# EAGLE board timer v5 (EAGLE 9.7.0)
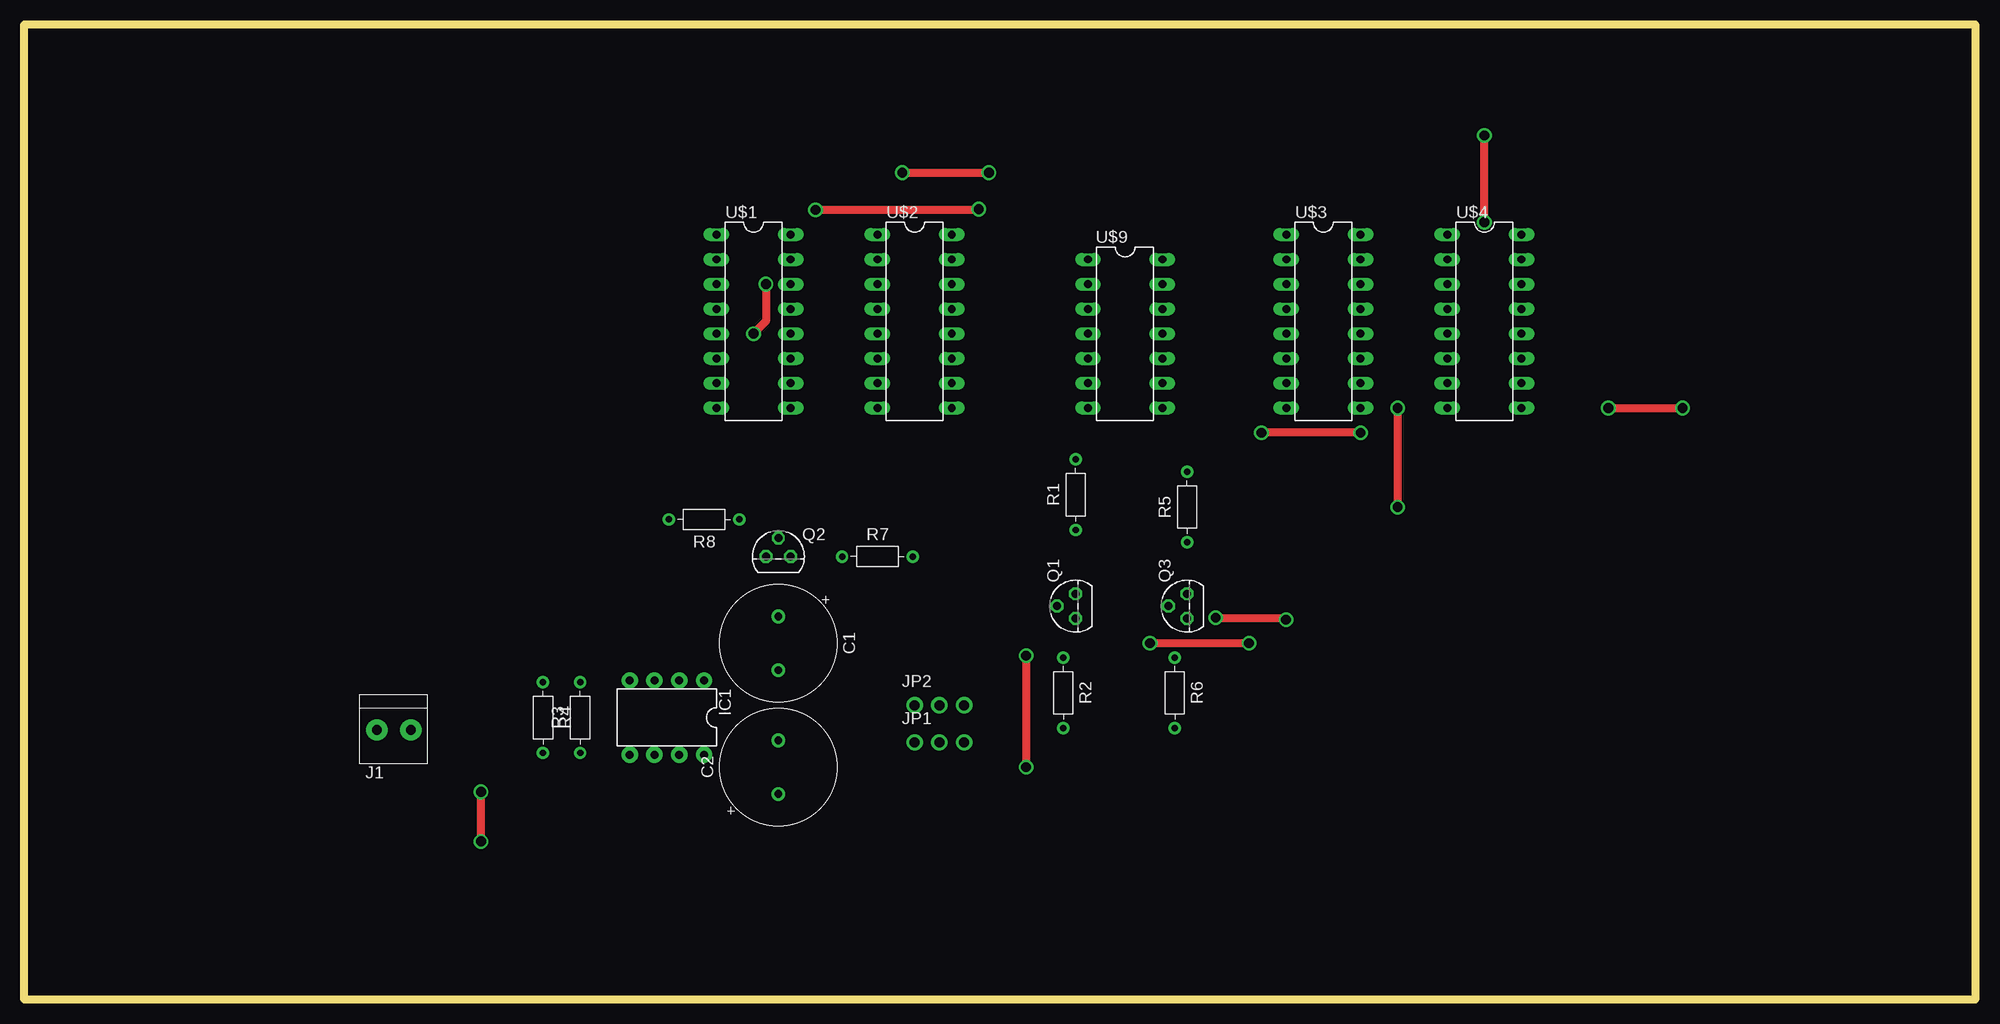
[diagram p0: board, top side]
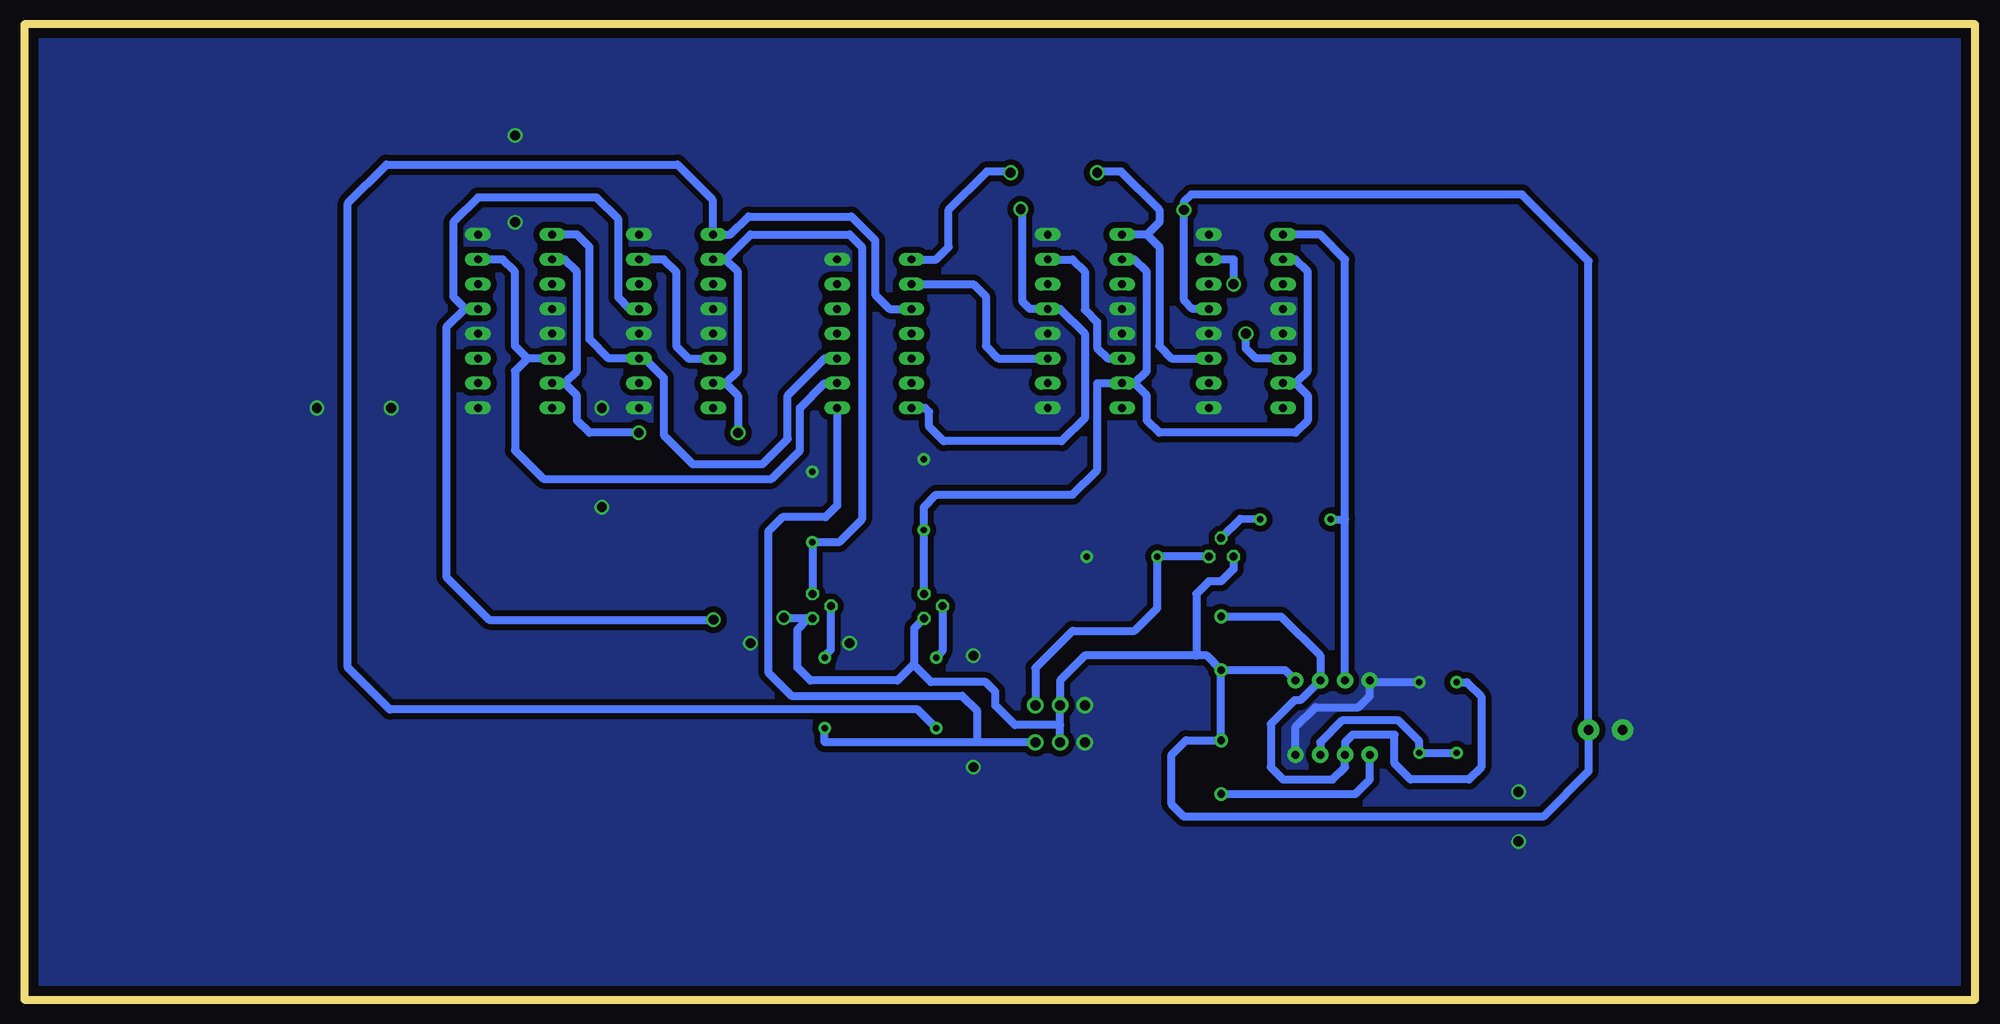
[diagram p1: board, bottom side, seen from below]

Size 200 x 100 mm. Coordinates in mm from the lower left corner, seen from the top.
Outline: 0,100 200,100 200,0 0,0 0,100
Copper layers (1*16): Top 0.035mm / dielectric 1.5mm / Bottom 0.035mm
Design rules "default": minimum track width 6mil, minimum drill 0.35mm, track to track 6mil, track to pad 6mil, pad to pad 6mil, via to via 6mil, smd to smd 6mil, copper to edge 40mil, drill to drill 6mil, minimum pad ring 10mil, minimum via ring 8mil, stop-mask expansion 4mil, vias tented up to drill 0mil, thermal gap 10mil

## Footprints (pad centres in the part's own frame; a part is rotated, then mirrored left to right if it is on the bottom)
CAPPRD550W60D1200H2000B = drill 0.8 pad 1.4: 1 -2.75,0; 2 2.75,0
DIL08-ROUND = drill 0.813 pad 1.676: 1 -3.81,-3.81; 2 -1.27,-3.81; 3 1.27,-3.81; 4 3.81,-3.81; 5 3.81,3.81; 6 1.27,3.81; 7 -1.27,3.81; 8 -3.81,3.81
1X2-3.5MM = drill 1 pad 2.184: 1 1.8,0; 2 -1.7,0
1X03-CLEANBIG = drill 1.016 pad 1.676: 1 -2.54,0; 2 0,0; 3 2.54,0
TO92 = drill 0.813 octagon: 1 -1.27,0; 2 0,1.905; 3 1.27,0
RESAD724W46L381D178B = drill 0.66 pad 1.26: 1 -3.62,0; 2 3.62,0
DIO16 = drill 0.813 long: 1 -15.24,-3.81; 2 -12.7,-3.81; 3 -10.16,-3.81; 4 -7.62,-3.81; 5 -5.08,-3.81; 6 -2.54,-3.81; 7 0,-3.81; 8 2.54,-3.81; 9 2.54,3.81; 10 0,3.81; 11 -2.54,3.81; 12 -5.08,3.81; 13 -7.62,3.81; 14 -10.16,3.81; 15 -12.7,3.81; 16 -15.24,3.81
DIO14 = drill 0.813 long: 1 -12.7,-3.81; 2 -10.16,-3.81; 3 -7.62,-3.81; 4 -5.08,-3.81; 5 -2.54,-3.81; 6 0,-3.81; 7 2.54,-3.81; 8 2.54,3.81; 9 0,3.81; 10 -2.54,3.81; 11 -5.08,3.81; 12 -7.62,3.81; 13 -10.16,3.81; 14 -12.7,3.81

## Placement (x,y rotation side)
C1  [CAPPRD550W60D1200H2000B]  77.3,36.53 270 top
C2  [CAPPRD550W60D1200H2000B]  77.3,23.83 90 top
IC1  LM555N  [DIL08-ROUND]  65.87,28.91 180 top
J1  1X2-3.5MM  [1X2-3.5MM]  37.93,27.64 180 top
JP1  [1X03-CLEANBIG]  93.81,26.37 0 top
JP2  [1X03-CLEANBIG]  93.81,30.18 0 top
Q1  NPN  [TO92]  107.78,40.34 90 top
Q2  NPN  [TO92]  77.3,45.42 0 top
Q3  NPN  [TO92]  119.21,40.34 90 top
R1  [RESAD724W46L381D178B]  107.78,51.77 90 top
R2  [RESAD724W46L381D178B]  106.51,31.45 270 top
R3  [RESAD724W46L381D178B]  56.98,28.91 90 top
R4  [RESAD724W46L381D178B]  53.17,28.91 270 top
R5  [RESAD724W46L381D178B]  119.21,50.5 90 top
R6  [RESAD724W46L381D178B]  117.94,31.45 270 top
R7  [RESAD724W46L381D178B]  87.46,45.42 0 top
R8  [RESAD724W46L381D178B]  69.68,49.23 180 top
U$1  74LS76  [DIO16]  74.76,63.2 270 top
U$2  74LS76  [DIO16]  91.27,63.2 270 top
U$3  74LS76  [DIO16]  133.18,63.2 270 top
U$4  74LS76  [DIO16]  149.69,63.2 270 top
U$9  74LS08  [DIO14]  112.86,63.2 270 top

## Library data of the parts
C1 C2 = Capacitor; CATEGORY: Capacitor
IC1 J1 JP1 JP2 = adafruit
Q1-Q3 = Transistor; CATEGORY: Transistor; SUB-CATEGORY: BJT; TYPE: NPN
R1-R8 = Tutorial - Fusion 360; CATEGORY: Resistor; SUB-CATEGORY: Fixed
U$1-U$4 U$9 = Library

## Nets
A1: U$1.6 U$1.15
A2: U$3.6 U$3.15
B1: U$1.11 U$2.1 U$9.1
B2: U$3.11 U$4.1 U$9.10
C1: U$2.6 U$2.15
C2: U$4.6 U$4.15 U$9.9
D1: U$2.11 U$9.2
D2: U$4.11
GND: C1.2 C2.2 IC1.1 J1.2 JP1.2 JP2.2 Q1.1 Q2.1 Q3.1 U$1.13 U$2.13 U$3.13 U$4.13 U$9.7
IN: IC1.3 R8.2 U$1.1
N$2: IC1.7 R3.1 R4.2
N$3: C1.1 IC1.2 IC1.6 R4.1
N$5: C2.1 IC1.5
N$6: Q2.2 R8.1
N$11: Q3.2 R6.1
N$16: Q1.2 R2.1
OUT1: R2.2 U$3.1 U$9.3
OUT2: JP1.3 R6.2 U$9.8
OUT_TO_DIS: JP2.3 Q2.3 R7.1
RES1: Q1.3 R1.1 U$1.2 U$1.7 U$2.2 U$2.7
RES2: Q3.3 R5.1 U$3.2 U$3.7 U$4.2 U$4.7
VCC: IC1.4 IC1.8 J1.1 JP1.1 JP2.1 R1.2 R3.2 R5.2 R7.2 U$1.4 U$1.5 U$1.9 U$1.12 U$1.16 U$2.4 U$2.5 U$2.9 U$2.12 U$2.16 U$3.4 U$3.5 U$3.9 U$3.12 U$3.16 U$4.4 U$4.5 U$4.9 U$4.12 U$4.16 U$9.14

## Tracks (layer width: path | path; a pad name or v marks a point on that pad's centre or on a via)
A1  (via drill 1)
  Top 0.813: v76.03,73.36 76.03,69.55 v74.76,68.28
  Bottom 0.813: U$1.15 76.03,75.9 v76.03,73.36 | U$1.6 73.72,65.74 74.76,66.78 v74.76,68.28
A2
  Bottom 0.813: U$3.15 134.45,75.9 133.18,74.63 133.18,67.01 131.91,65.74 U$3.6
B1  (via drill 1)
  Top 0.813: v90,84.79 v98.89,84.79
  Bottom 0.813: 84.92,78.44 U$2.1 | 84.92,78.44 83.65,77.17 83.65,67.01 82.38,65.74 U$1.11 | U$9.1 106.51,75.9 105.24,77.17 105.24,80.98 101.32,84.9 99,84.9 v98.89,84.79 | 84.92,78.44 83.65,79.71 83.65,80.98 87.57,84.9 89.89,84.9 v90,84.79
B2
  Bottom 0.813: U$4.1 143.34,78.44 142.07,77.17 142.07,67.71 140.1,65.74 U$3.11 136.42,65.74 134.45,63.77 134.45,57.89 131.47,54.91 124.33,54.91 121.75,57.49 121.75,61.93 117.94,65.74 U$9.10
C1
  Bottom 0.813: U$2.15 92.54,75.9 91.27,74.63 91.27,70.75 90.02,69.49 90.02,66.83 88.93,65.74 U$2.6
C2
  Bottom 0.813: U$4.6 148.42,65.74 | 148.42,65.74 149.69,67.01 149.69,74.63 150.96,75.9 U$4.15 | U$9.9 117.94,63.2 120.48,60.66 120.48,56.32 123.42,53.38 146.75,53.38 149.69,56.32 149.69,64.47 148.42,65.74
D1
  Bottom 0.813: U$9.2 102.7,73.36 101.43,72.09 101.43,67.01 100.16,65.74 U$2.11
GND  (via drill 1)
  Top 0.813: v81.11,80.98 97.77,80.98 v97.84,81.05 | v122.15,39.15 129.15,39.15 v129.35,38.95
  Bottom 0.813: U$3.13 137.93,70.82 139.1,71.99 139.1,80.01 141.34,82.25 153.5,82.25 156.04,79.71 156.04,72.09 154.77,70.82 U$4.13 154.88,70.82 156.75,68.95 156.75,43.35 152.35,38.95 v129.35,38.95 | C1.2 C2.2 80.9,26.58 82.38,25.1 82.38,20.02 81.11,18.75 44.28,18.75 39.63,23.4 J1.2 39.63,75.73 46.45,82.55 80.35,82.55 81.15,81.75 81.15,81.02 v81.11,80.98 81.11,71.71 80.22,70.82 U$1.13 | C1.2 70.74,33.78 IC1.1 | C1.2 78.78,35.26 79.84,35.26 | 79.84,35.26 91.27,35.26 93.81,32.72 JP2.2 93.81,28.15 | Q2.1 76.03,44.15 77.3,42.88 78.57,42.88 79.84,41.61 79.84,35.26 | JP1.2 93.81,28.15 | U$9.7 107.66,60.66 107.25,60.25 107.25,58.75 105.75,57.25 93.65,57.25 91.28,59.62 91.28,68.29 93.81,70.82 U$2.13 96.92,70.82 97.65,71.55 97.65,81.05 v97.84,81.05 | Q1.1 108.75,38.1 108.75,34.45 108.85,34.35 | 119.63,39.07 120.75,37.95 120.75,34.05 119.41,32.72 110.48,32.72 108.85,34.35 | 119.63,39.07 Q3.1 | 93.81,28.15 98.45,28.15 100.45,30.15 100.45,31.55 101.45,32.55 107.05,32.55 108.85,34.35 | v122.15,39.15 119.71,39.15 119.63,39.07
IN
  Bottom 0.813: IC1.3 64.6,49.23 | 64.6,49.23 64.6,75.9 67.14,78.44 U$1.1 | R8.2 64.6,49.23
N$2
  Bottom 0.813: R4.2 R3.1 56.98,26.46 59.12,28.61 64.91,28.61 67.14,26.37 IC1.7
N$3
  Bottom 0.813: C1.1 71.16,39.28 67.14,35.26 IC1.2 69.18,30.68 69.78,30.68 72.22,28.24 72.22,23.83 70.95,22.56 65.87,22.56 64.6,23.83 IC1.6 64.6,26.37 63.83,27.14 59.52,27.14 59.52,24.2 57.88,22.56 51.9,22.56 50.63,23.83 50.63,31.07 52.09,32.53 R4.1
N$5
  Bottom 0.813: C2.1 63.54,21.08 62.06,22.56 IC1.5
N$6
  Bottom 0.813: R8.1 75.35,49.28 Q2.2
N$11
  Bottom 0.813: Q3.2 117.3,35.9 117.94,35.26 R6.1
N$16
  Bottom 0.813: R2.1 105.88,35.71 Q1.2
OUT1
  Bottom 0.813: U$9.3 111.29,70.82 112.77,72.3 112.77,77.87 115.2,80.31 125.76,80.31 127.62,78.44 U$3.1 129.45,78.52 129.45,82.02 133.05,85.62 162.88,85.62 166.85,81.65 166.85,34.05 162.55,29.75 108.43,29.75 R2.2
OUT2
  Bottom 0.813: R6.2 117.94,26.37 102.35,26.37 | JP1.3 102.35,26.37 | U$9.8 116.67,50.66 117.85,49.48 122.25,49.48 123.75,47.98 123.75,33.55 121.35,31.15 103.85,31.15 102.35,29.65 102.35,26.37
OUT_TO_DIS
  Bottom 0.813: Q2.3 R7.1 83.84,40.15 86.19,37.8 92.54,37.8 96.35,33.99 JP2.3
RES1
  Bottom 0.813: U$2.2 86.19,75.9 84.92,74.63 84.92,64.47 86.19,63.2 | 86.19,63.2 U$2.7 90,63.2 90,54.31 92.54,51.77 106.51,51.77 107.78,50.5 R1.1 Q1.3 | U$1.2 69.68,75.9 68.41,74.63 68.41,64.47 69.68,63.2 | 69.68,63.2 U$1.7 | 69.68,63.2 68.41,61.93 68.41,59.39 69.68,58.12 83.65,58.12 84.92,59.39 84.92,61.93 86.19,63.2
RES2  (via drill 1)
  Top 0.813: v136.99,58.12 v126.83,58.12
  Bottom 0.813: 144.61,63.2 143.34,64.47 143.34,74.63 144.61,75.9 U$4.2 | 128.1,63.2 126.83,64.47 126.83,74.63 128.1,75.9 | U$4.7 144.61,63.2 | Q3.3 R5.1 116.48,46.88 114.13,49.23 114.13,77.17 115.4,78.44 125.56,78.44 128.1,75.9 | 128.1,63.2 U$3.7 | 128.1,63.2 126.83,61.93 v126.83,58.12 | v136.99,58.12 142.07,58.12 143.34,59.39 143.34,61.93 144.61,63.2 | U$3.2 128.1,75.9
VCC  (via drill 1)
  Top 0.813: v149.69,79.71 v149.69,88.6 | v162.39,60.66 v170.01,60.66 | v140.8,50.5 v140.8,60.66 | v102.7,35.26 v102.7,23.83 | v125.56,36.53 v115.4,36.53 | v46.82,16.21 v46.82,21.29
  Bottom 0.813: IC1.8 69.68,27.94 67.65,29.97 63.21,29.97 62.06,31.12 IC1.4 61.87,32.53 R3.2
  pour Bottom (isolate 0.61, no thermals): 0.66,0.83 198.98,0.83 198.98,100.43 0.66,100.43